# Allegro board democ2.brd
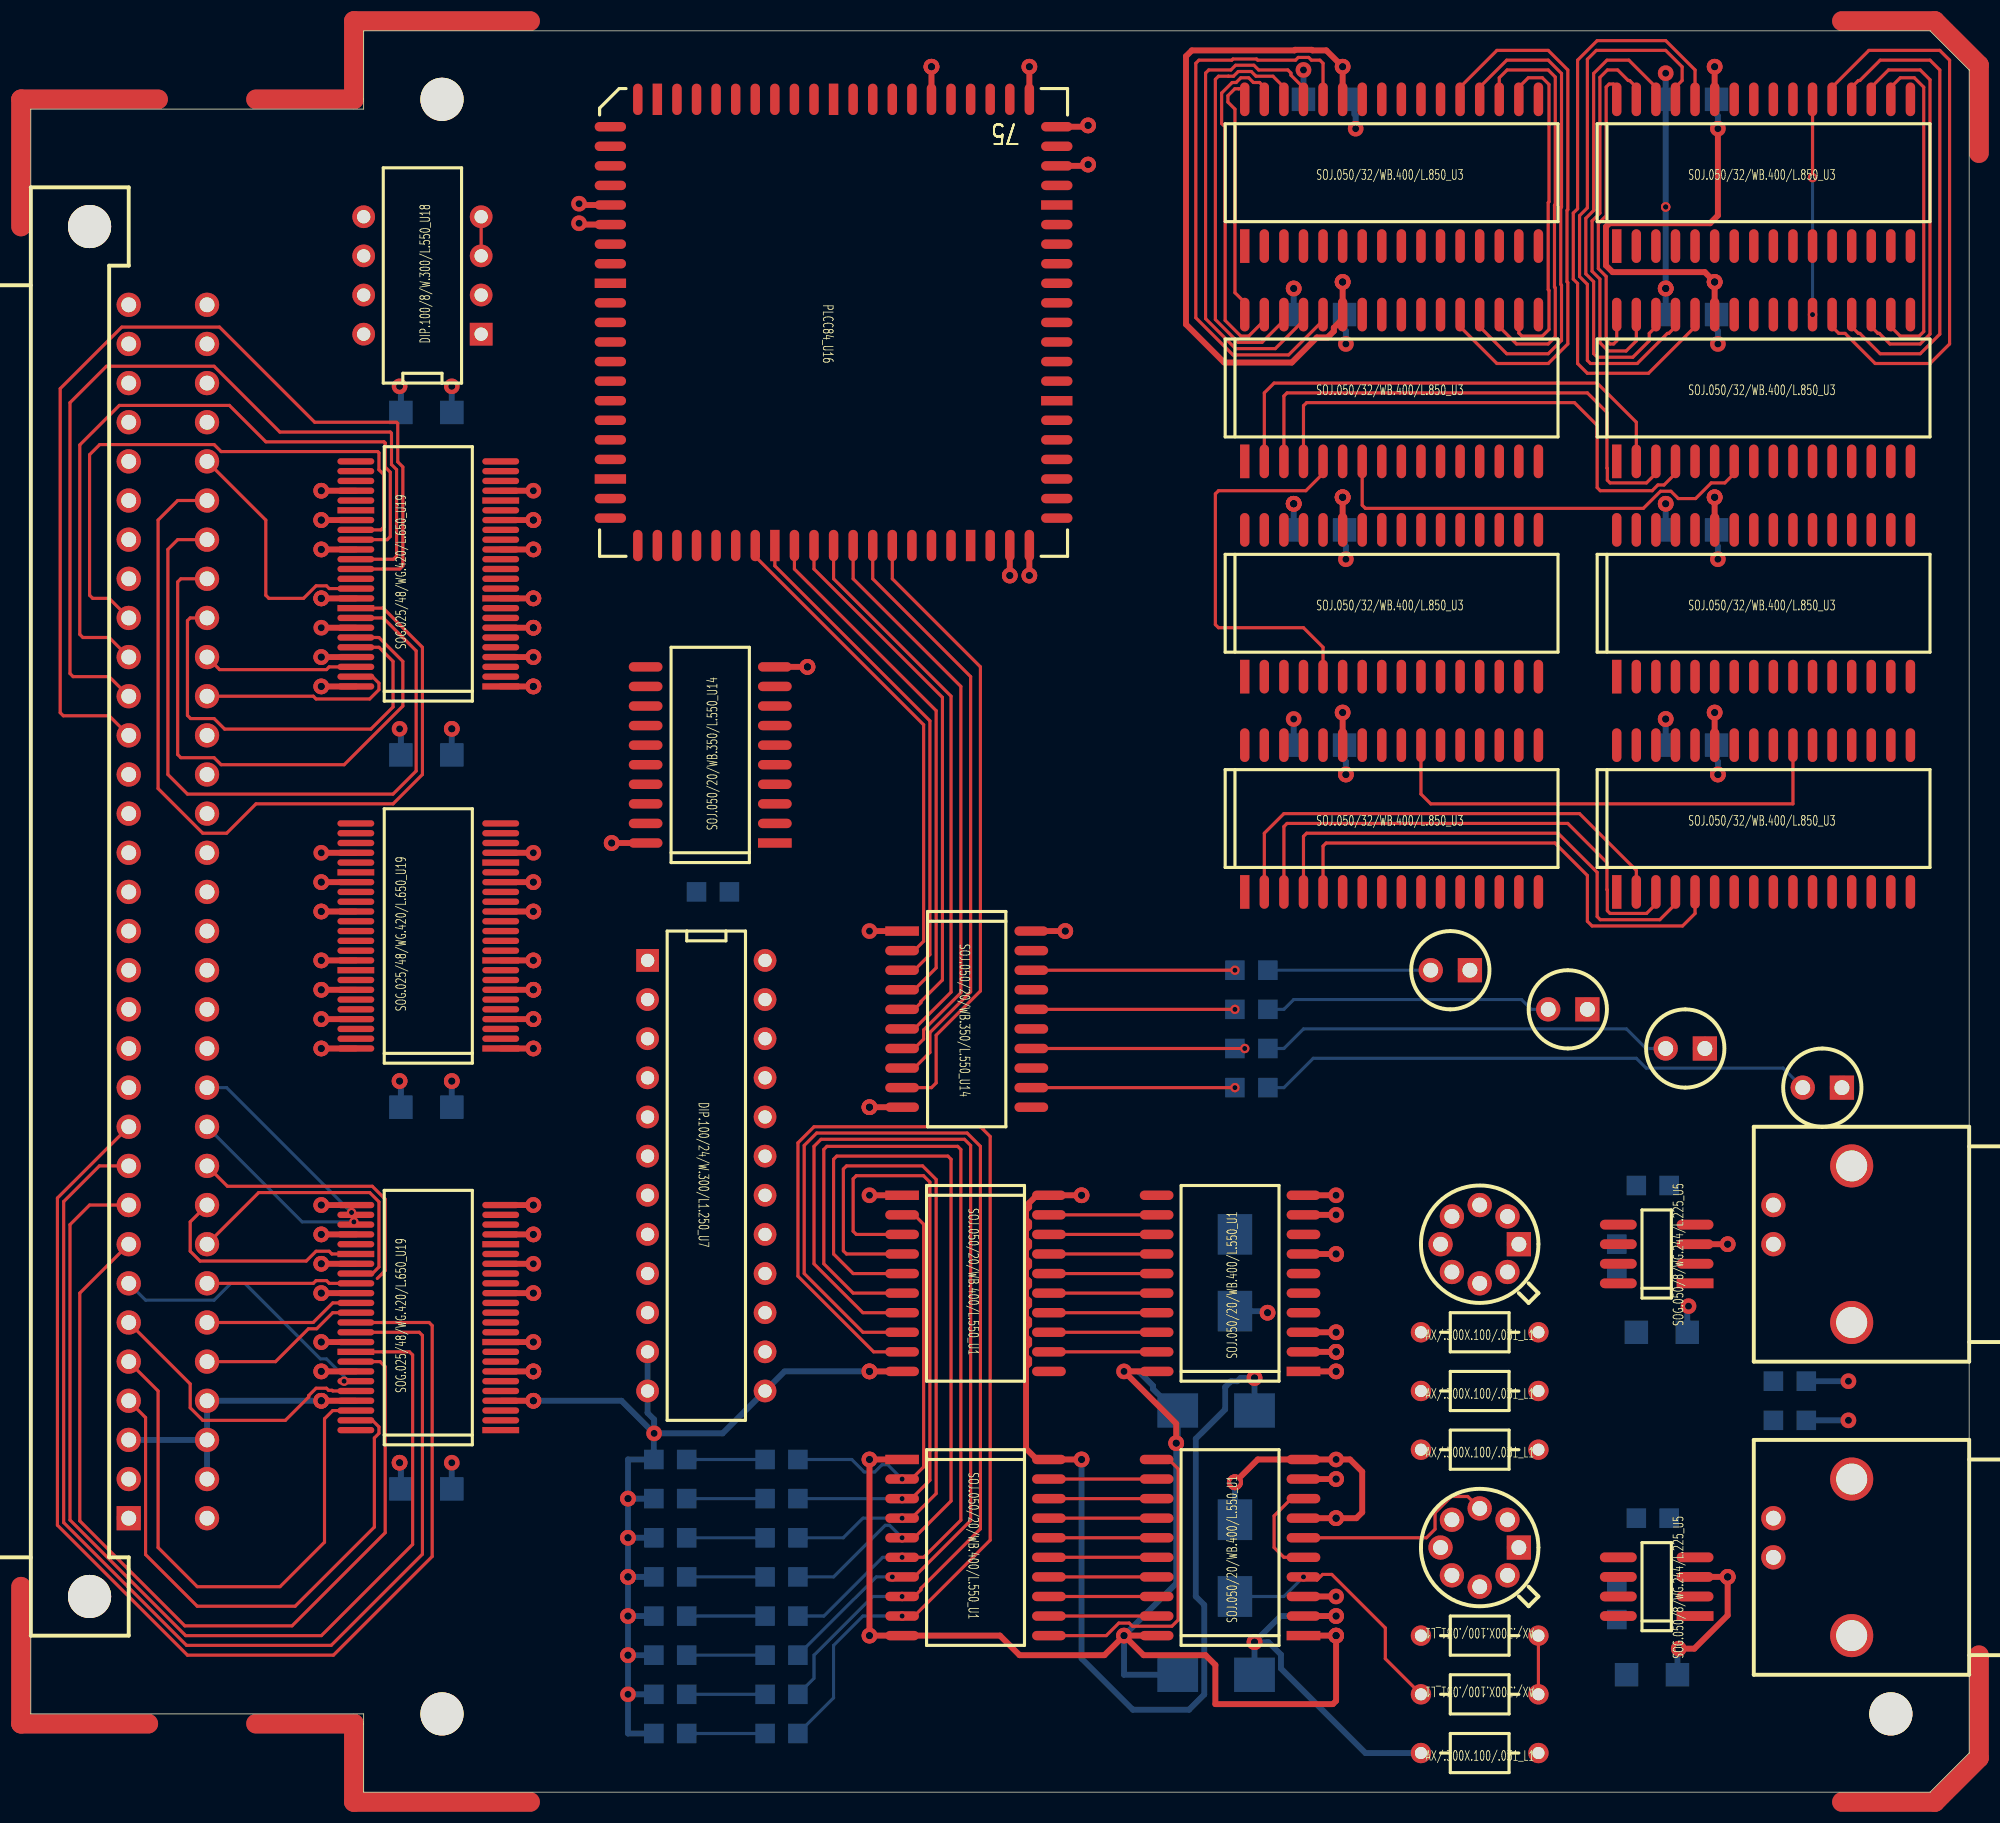
[diagram p0: board, top side]
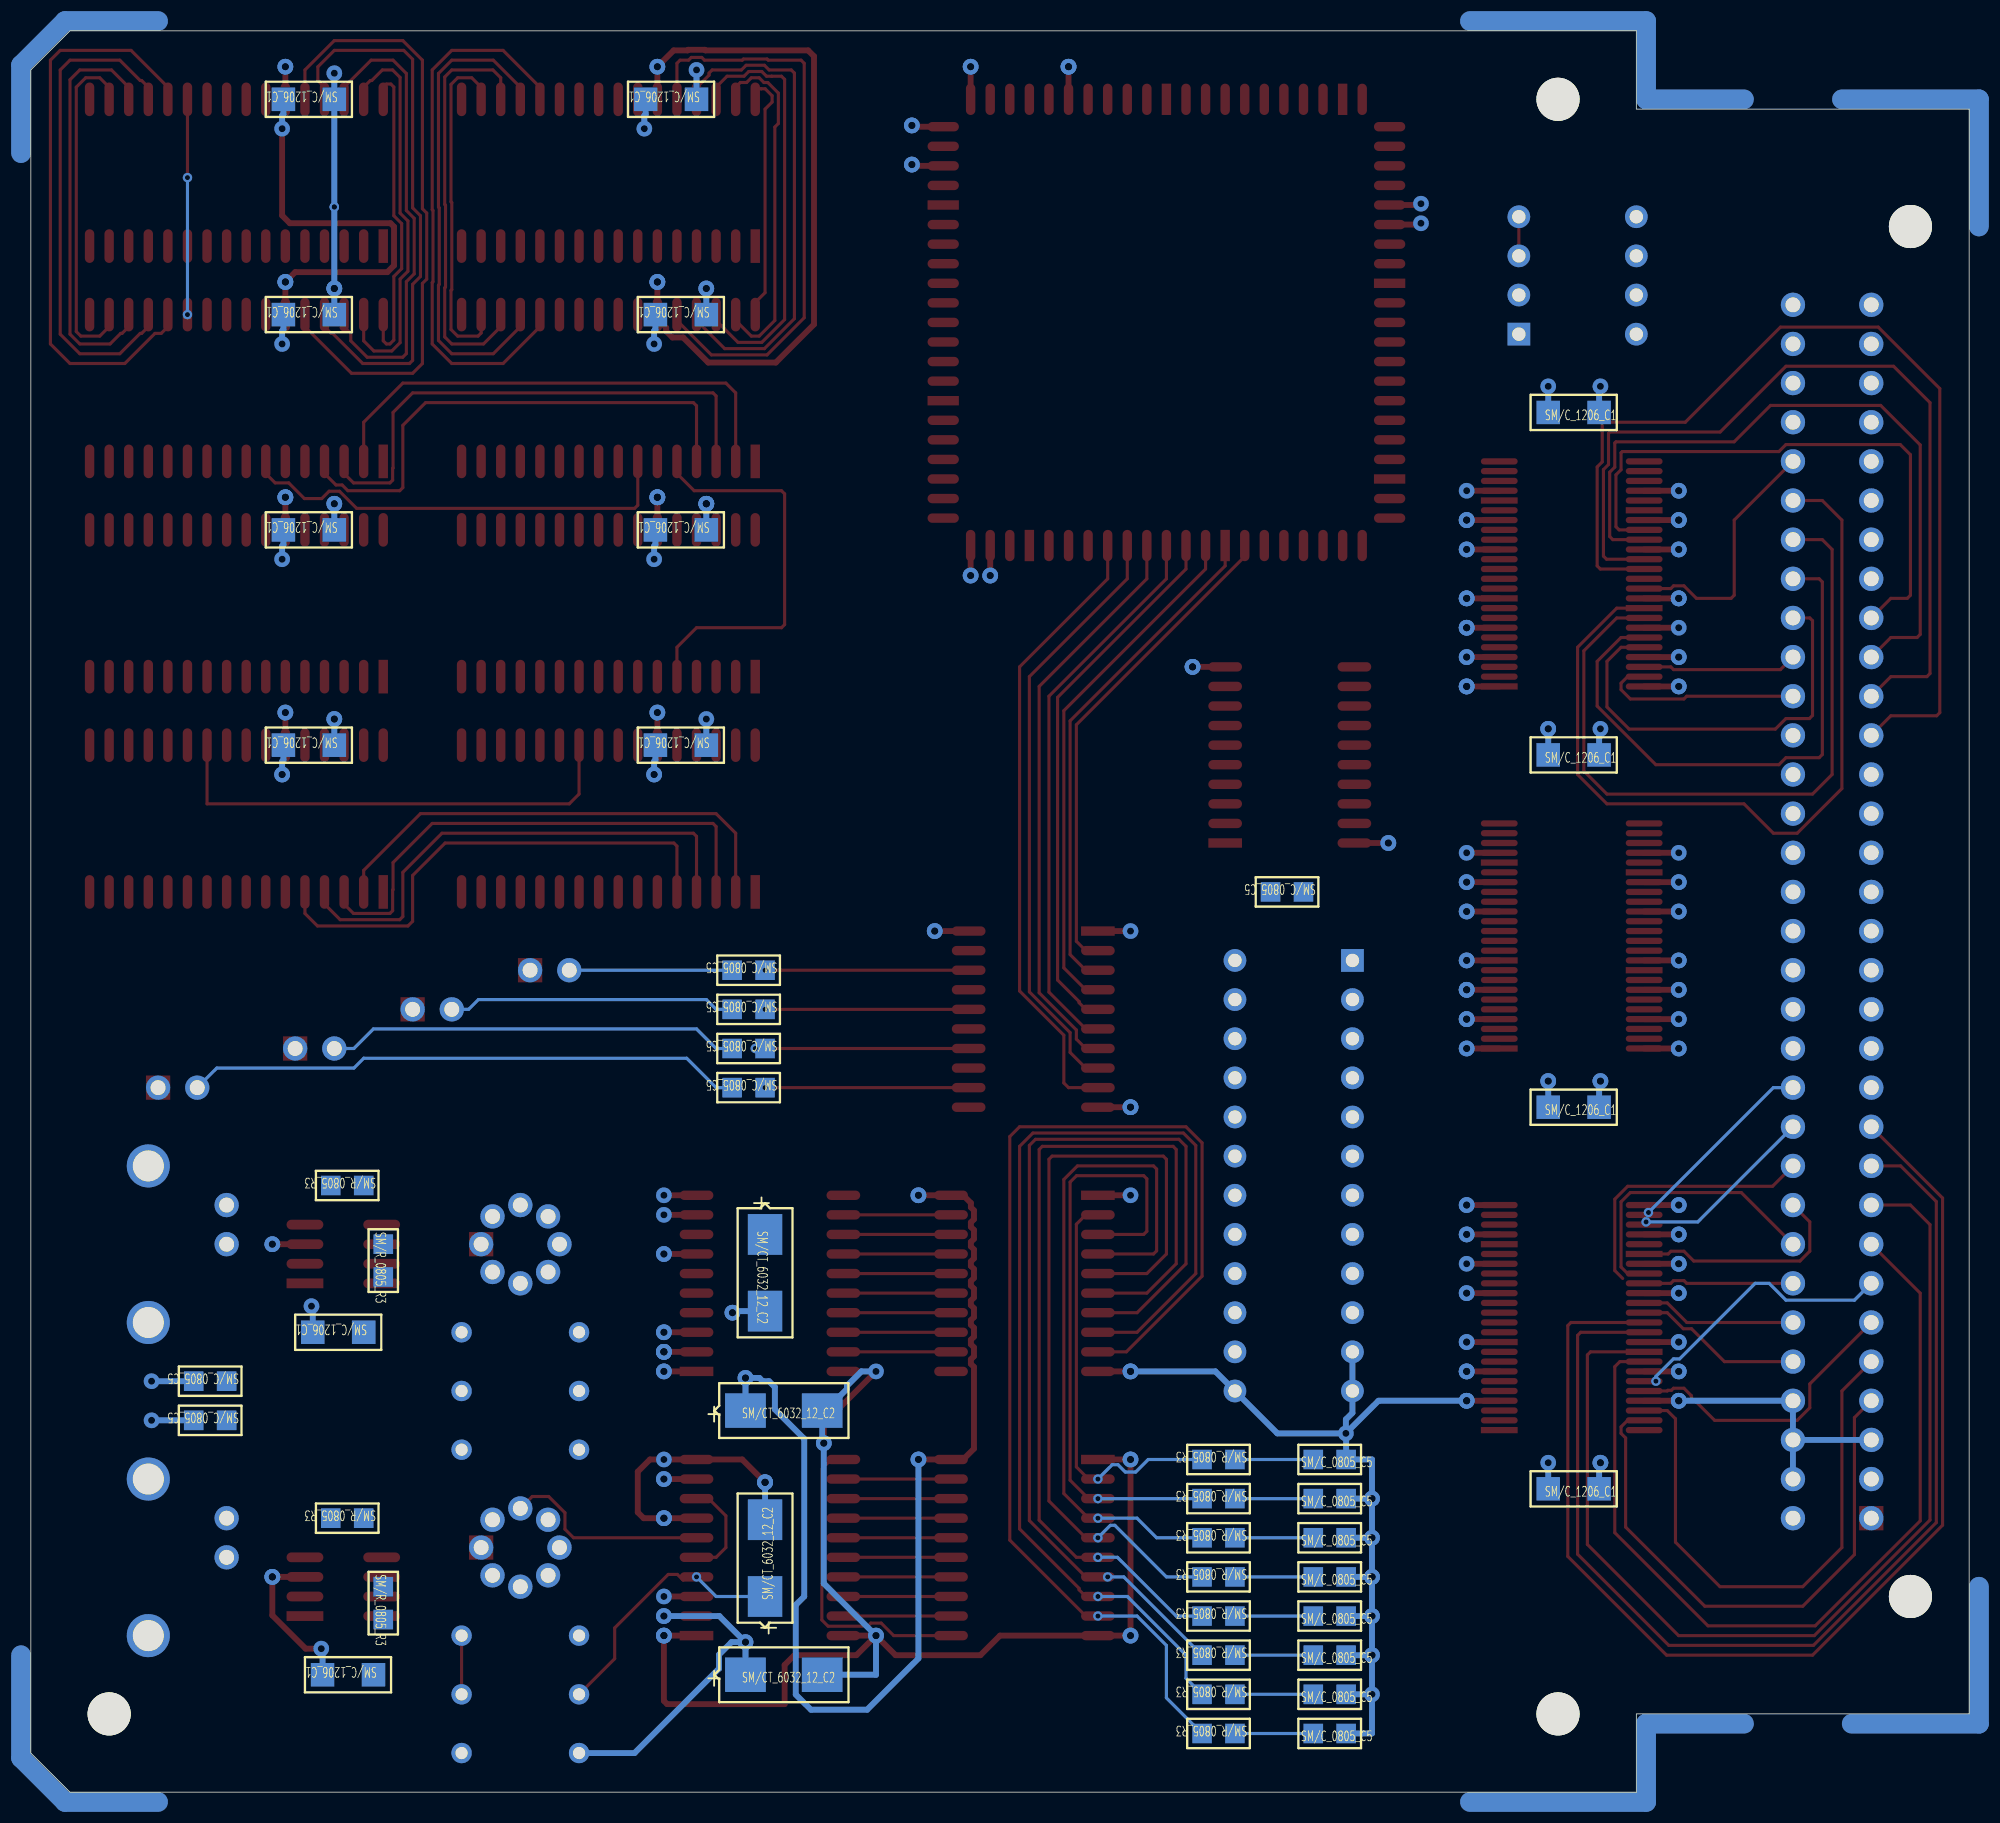
[diagram p1: board, bottom side, seen from below]

Outline 125.73 x 114.3 mm; copper layers: TOP, GND, POWER, BOTTOM. Coordinates in mm from the lower left corner of the outline.
Outline path: 0,109.22 21.59,109.22 21.59,114.3 123.19,114.3 125.73,111.76 125.73,2.54 123.19,0 21.59,0 21.59,5.08 0,5.08 0,109.22

## Design rules (mm)
nets with their own width: min track width 0.203; nets A0 A1 A2 A3 A4 A5 A6 A7 A8 A9 A10 A11 A12 A13 A14 A15 A16 A17 A18 A19 A20 A21 A22 A23 AEN/ BA0 BA1 BA2 BA3 BD0 BD1 BD2 BD3 BD4 BD5 BD6 BD7 BD8 BD9 BD10 BD11 BD12 BD13 BD14 BD15 BRD/ BRESET BWR/ D0 D1 D2 D3 D4 D5 D6 D7 D9 D10 D11 D12 D13 D14 D15 DDIR DEN/ DHEN/ FPGA/ GAIN HS/ MCLK MRD/ MWR/ N00036 N00036_6360 N00038 N00038_6372 N00044 N00044_6366 N00046 N00046_6362 N00048 N00048_6359 N00060 N00060_6368 N00306 N00318 N00322 N00671 N00689 N00703 N00717 N00827 N00831 N00835 N00837 N04966 N05690 N05692 N05694 N05696 N05698 N05700 N05702 N05704 N11940 N11950 N11984 N11994 N12004 N19706 N19710 N19714 N19718 N19934 N19938 N19942 N23417 N23878 N24816 N24821 N24826 N84247 N103899 N255822 N314771 N315146 N315333 N320476 N336036 N336041 OUTA OUTC RA0 RA1 RA2 RA3 RA4 RA5 RA6 RA7 RA8 RA9 RA10 RA11 RA12 RA13 RA14 RA15 RD0 RD1 RD2 RD3 RD4 RD5 RD6 RD7 RDY/ RESET/ SEL VCLKA VCLKC VD0 VD1 VD2 VD3 VD4 VD5 VD6 VD7 WAIT/ WSTAT/
nets with their own width: min track width 0.381; nets GND GND_EARTH V12N V+12 VCC

## Placement (name value [footprint] x y rotation side)
C1  .1UF  [SMC1206]  104.14 29.84 0 bottom
C2  .1UF  [SMCT603212]  79.38 24.77 180 bottom
C3  .1UF  [SMCT603212]  79.38 7.62 180 bottom
C4  .1UF  [SMC1206]  106.05 109.86 0 bottom
C5  3300  [SMC0805]  42.55 6.35 180 bottom
C6  .1UF  [SMC1206]  103.51 7.62 0 bottom
C7  3300  [SMC0805]  42.55 21.59 180 bottom
C8  3300  [SMC0805]  42.55 8.89 180 bottom
C9  .1UF  [SMC1206]  27.3 89.53 180 bottom
C10  .1UF  [SMC1206]  27.3 67.31 180 bottom
C11  .1UF  [SMC1206]  27.3 44.45 180 bottom
C12  .1UF  [SMC1206]  106.05 81.91 0 bottom
C13  .1UF  [SMC1206]  106.05 95.89 0 bottom
C14  .1UF  [SMC1206]  106.05 67.95 0 bottom
C15  .1UF  [SMC1206]  27.3 19.69 180 bottom
C16  3300  [SMC0805]  42.55 11.43 180 bottom
C17  3300  [SMC0805]  42.55 13.97 180 bottom
C18  47PF  [SMC0805]  113.03 26.67 0 bottom
C19  3300  [SMC0805]  42.55 3.81 180 bottom
C20  3300  [SMC0805]  42.55 16.51 180 bottom
C21  .1UF  [SMCT603212]  78.11 12.7 90 bottom
C22  .1UF  [SMCT603212]  78.11 36.2 270 bottom
C23  47PF  [SMC0805]  113.03 24.13 0 bottom
C24  3300  [SMC0805]  42.55 19.05 180 bottom
C25  .1UF  [SMC1206]  82.55 109.86 0 bottom
C26  .1UF  [SMC1206]  81.92 95.89 0 bottom
C27  .1UF  [SMC1206]  81.92 81.91 0 bottom
C28  .1UF  [SMC1206]  81.92 67.95 0 bottom
D1  DIODE PHOTO EMIT  [LED]  100.97 50.8 180 top
D2  DIODE PHOTO EMIT  [LED]  93.34 53.34 180 top
D3  DIODE PHOTO EMIT  [LED]  108.59 48.26 180 top
D4  DIODE PHOTO EMIT  [LED]  117.48 45.72 180 top
J1  CON PAD  [DIN64P]  6.35 17.78 90 top
J2  CHANNEL 1  [BNC2P]  113.03 15.24 270 top
J3  CHANNEL 2  [BNC2P]  113.03 35.56 270 top
L1  50  [AX300X100031]  90.17 22.23 0 top
L2  50  [AX300X100031]  90.17 29.84 0 top
L3  50  [AX300X100031]  97.79 6.35 180 top
L4  50  [AX300X100031]  90.17 26.03 0 top
L5  50  [AX300X100031]  97.79 10.16 180 top
L6  50  [AX300X100031]  90.17 2.54 0 top
MTH1  -  [MTHOLE1]  26.67 109.86 0 top
MTH2  -  [MTHOLE1]  26.67 5.08 0 top
MTH3  -  [MTHOLE1]  120.65 5.08 0 top
R1  150  [SMC0805]  78.11 53.34 0 bottom
R2  150  [SMC0805]  78.11 50.8 0 bottom
R3  100  [SMR0805]  104.14 17.78 0 bottom
R4  100  [SMR0805]  102.87 13.34 270 bottom
R5  100  [SMR0805]  102.87 35.56 270 bottom
R6  100  [SMR0805]  104.14 39.37 0 bottom
R7  50  [SMR0805]  47.62 21.59 0 bottom
R8  50  [SMR0805]  47.62 8.89 0 bottom
R9  50  [SMR0805]  47.62 11.43 0 bottom
R10  50  [SMR0805]  47.62 6.35 0 bottom
R11  50  [SMC0805]  43.18 58.42 0 bottom
R12  150  [SMC0805]  78.11 45.72 0 bottom
R13  50  [SMR0805]  47.62 19.05 0 bottom
R14  50  [SMR0805]  47.62 16.51 0 bottom
R15  50  [SMR0805]  47.62 13.97 0 bottom
R16  50  [SMR0805]  47.62 3.81 0 bottom
R17  150  [SMC0805]  78.11 48.26 0 bottom
U1  TLC5602A  [SOJ05020WB400L550]  82.55 10.16 90 top
U2  TLC5602A  [SOJ05020WB400L550]  82.55 27.3 90 top
U3  TC55B4257J  [SOJ05032WB400L850]  102.87 86.36 0 top
U4  TC55B4257J  [SOJ05032WB400L850]  102.87 100.33 0 top
U5  DG419A  [SOG0508WG244L225]  107.95 33.02 90 top
U6  DG419A  [SOG0508WG244L225]  107.95 11.43 90 top
U7  20L10  [DIP10024W300L1250]  40 53.98 270 top
U8  TC55B4257J  [SOJ05032WB400L850]  78.74 72.39 0 top
U9  TC55B4257J  [SOJ05032WB400L850]  78.74 100.33 0 top
U10  TC55B4257J  [SOJ05032WB400L850]  102.87 72.39 0 top
U11  TC55B4257J  [SOJ05032WB400L850]  102.87 58.42 0 top
U12  TC55B4257J  [SOJ05032WB400L850]  78.74 58.42 0 top
U13  TC55B4257J  [SOJ05032WB400L850]  78.74 86.36 0 top
U14  ACT574  [SOJ05020WB350L550]  56.52 55.88 270 top
U15  ACT574  [SOJ05020WB400L550]  56.52 21.59 270 top
U16  EPF8282  [PLCC84]  52.07 109.86 270 top
U17  ACT574  [SOJ05020WB400L550]  56.52 38.73 270 top
U18  EPC1064  [DIP1008W300L550]  29.21 94.61 90 top
U19  FCT16245  [SOG02548WG420L650]  30.48 71.75 90 top
U20  FCT16245  [SOG02548WG420L650]  30.48 23.49 90 top
U21  FCT16245  [SOG02548WG420L650]  30.48 48.26 90 top
U22  TLE2037A  [TO-99]  96.52 35.56 90 top
U23  TLE2037A  [TO-99]  96.52 15.88 90 top
U25  74ACT574  [SOJ05020WB350L550]  48.26 61.59 90 top

## Library data of the parts
C1-C3 C5-C8 C16 C17 C19-C22 C24 = CAP: alternate symbols: (SMCT603212;SMC0805)
C4 C9-C15 C25-C28 = CAP_NP
C18 C23 = CAPACITOR
D1-D4 = DIODE_PHOTO_EMIT
J1 = 64CONSEPPINS
J2 J3 = BNC
L1-L6 = INDUCTOR
MTH1-MTH3 = MTHOLE1
R1-R17 = R: alternate symbols: (SMR0805)
U1 U2 = TLC5602A
U3 U4 U8-U13 = TC56B4257J
U5 U6 = DG419A
U7 = 20L10
U14 U15 U17 = ACT574: alternate symbols: (SOJ05020WB400L550)
U16 = FPGA_0
U18 = EPC1064
U19-U21 = FCT16245
U22 U23 = TLE2037A
U25 = 74ACT574

## Footprints (pads in the part's own frame, mm; a bottom-side part is the same pattern mirrored in y, then rotated)
AX300X100031
  round 1.321 hole 0.787: 1(0,0) 2(7.62,0)
BNC2P
  round 1.575 hole 0.965: 1(0,0) 2(-2.54,0)
  round 2.794 hole 2.007: 3(5.08,5.08) 4(-5.08,5.08)
DIN64P
  rect 1.575x1.575 hole 0.965: 1(0,0)
  round 1.575 hole 0.965: 2(2.54,0) 3(5.08,0) 4(7.62,0) 5(10.16,0) 6(12.7,0) 7(15.24,0) 8(17.78,0) 9(20.32,0) 10(22.86,0) 11(25.4,0) 12(27.94,0) 13(30.48,0) 14(33.02,0) 15(35.56,0) 16(38.1,0) 17(40.64,0) 18(43.18,0) 19(45.72,0) 20(48.26,0) 21(50.8,0) 22(53.34,0) 23(55.88,0) 24(58.42,0) 25(60.96,0) 26(63.5,0) 27(66.04,0) 28(68.58,0) 29(71.12,0) 30(73.66,0) 31(76.2,0) 32(78.74,0) 33(0,-5.08) 34(2.54,-5.08) 35(5.08,-5.08) 36(7.62,-5.08) 37(10.16,-5.08) 38(12.7,-5.08) 39(15.24,-5.08) 40(17.78,-5.08) 41(20.32,-5.08) 42(22.86,-5.08) 43(25.4,-5.08) 44(27.94,-5.08) 45(30.48,-5.08) 46(33.02,-5.08) 47(35.56,-5.08) 48(38.1,-5.08) 49(40.64,-5.08) 50(43.18,-5.08) 51(45.72,-5.08) 52(48.26,-5.08) 53(50.8,-5.08) 54(53.34,-5.08) 55(55.88,-5.08) 56(58.42,-5.08) 57(60.96,-5.08) 58(63.5,-5.08) 59(66.04,-5.08) 60(68.58,-5.08) 61(71.12,-5.08) 62(73.66,-5.08) 63(76.2,-5.08) 64(78.74,-5.08)
  round 2.794 hole 2.794: 65(83.82,2.54) 66(-5.08,2.54)
DIP1008W300L550
  rect 1.473x1.473 hole 0.864: 1(0,0)
  round 1.473 hole 0.864: 2(2.54,0) 3(5.08,0) 4(7.62,0) 5(7.62,7.62) 6(5.08,7.62) 7(2.54,7.62) 8(0,7.62)
DIP10024W300L1250
  rect 1.473x1.473 hole 0.864: 1(0,0)
  round 1.473 hole 0.864: 2(2.54,0) 3(5.08,0) 4(7.62,0) 5(10.16,0) 6(12.7,0) 7(15.24,0) 8(17.78,0) 9(20.32,0) 10(22.86,0) 11(25.4,0) 12(27.94,0) 13(27.94,7.62) 14(25.4,7.62) 15(22.86,7.62) 16(20.32,7.62) 17(17.78,7.62) 18(15.24,7.62) 19(12.7,7.62) 20(10.16,7.62) 21(7.62,7.62) 22(5.08,7.62) 23(2.54,7.62) 24(0,7.62)
LED
  rect 1.575x1.575 hole 0.965: 1(0,0)
  round 1.575 hole 0.965: 2(2.54,0)
MTHOLE1
  round 2.794 hole 2.794: 1(0,0)
PLCC84
  rect 2.032x0.61 smd: 1(0,0) 10(0,-11.43) 40(28.956,-3.81) 50(28.956,8.89)
  oval 2.032x0.61 smd: 2(0,-1.27) 3(0,-2.54) 4(0,-3.81) 5(0,-5.08) 6(0,-6.35) 7(0,-7.62) 8(0,-8.89) 9(0,-10.16) 11(0,-12.7) 33(28.956,-12.7) 34(28.956,-11.43) 35(28.956,-10.16) 36(28.956,-8.89) 37(28.956,-7.62) 38(28.956,-6.35) 39(28.956,-5.08) 41(28.956,-2.54) 42(28.956,-1.27) 43(28.956,0) 44(28.956,1.27) 45(28.956,2.54) 46(28.956,3.81) 47(28.956,5.08) 48(28.956,6.35) 49(28.956,7.62) 51(28.956,10.16) 52(28.956,11.43) 53(28.956,12.7) 75(0,12.7) 76(0,11.43) 77(0,10.16) 78(0,8.89) 79(0,7.62) 80(0,6.35) 81(0,5.08) 82(0,3.81) 83(0,2.54) 84(0,1.27)
  oval 0.61x2.032 smd: 12(1.778,-14.478) 13(3.048,-14.478) 14(4.318,-14.478) 15(5.588,-14.478) 16(6.858,-14.478) 17(8.128,-14.478) 18(9.398,-14.478) 19(10.668,-14.478) 21(13.208,-14.478) 22(14.478,-14.478) 23(15.748,-14.478) 24(17.018,-14.478) 25(18.288,-14.478) 26(19.558,-14.478) 27(20.828,-14.478) 28(22.098,-14.478) 29(23.368,-14.478) 31(25.908,-14.478) 32(27.178,-14.478) 54(27.178,14.478) 55(25.908,14.478) 56(24.638,14.478) 57(23.368,14.478) 58(22.098,14.478) 59(20.828,14.478) 61(18.288,14.478) 62(17.018,14.478) 63(15.748,14.478) 64(14.478,14.478) 65(13.208,14.478) 66(11.938,14.478) 67(10.668,14.478) 68(9.398,14.478) 69(8.128,14.478) 71(5.588,14.478) 72(4.318,14.478) 73(3.048,14.478) 74(1.778,14.478)
  rect 0.61x2.032 smd: 20(11.938,-14.478) 30(24.638,-14.478) 60(19.558,14.478) 70(6.858,14.478)
SMC0805
  rect 1.27x1.27 smd: 1(0,0) 2(2.134,0)
SMC1206
  rect 1.524x1.524 smd: 1(0,0) 2(3.302,0)
SMCT603212
  rect 2.642x2.235 smd: 1(0,0) 2(4.978,0)
SMR0805
  rect 1.27x1.27 smd: 1(0,0) 2(2.134,0)
SOG0508WG244L225
  rect 0.635x2.388 smd: 1(0,0)
  oval 0.635x2.388 smd: 2(1.27,0) 3(2.54,0) 4(3.81,0) 5(3.81,4.978) 6(2.54,4.978) 7(1.27,4.978) 8(0,4.978)
SOG02548WG420L650
  rect 0.406x2.388 smd: 1(0,0) 10(5.715,0) 20(12.065,0) 30(11.43,9.398) 40(5.08,9.398)
  oval 0.406x2.388 smd: 2(0.635,0) 3(1.27,0) 4(1.905,0) 5(2.54,0) 6(3.175,0) 7(3.81,0) 8(4.445,0) 9(5.08,0) 11(6.35,0) 12(6.985,0) 13(7.62,0) 14(8.255,0) 15(8.89,0) 16(9.525,0) 17(10.16,0) 18(10.795,0) 19(11.43,0) 21(12.7,0) 22(13.335,0) 23(13.97,0) 24(14.605,0) 25(14.605,9.398) 26(13.97,9.398) 27(13.335,9.398) 28(12.7,9.398) 29(12.065,9.398) 31(10.795,9.398) 32(10.16,9.398) 33(9.525,9.398) 34(8.89,9.398) 35(8.255,9.398) 36(7.62,9.398) 37(6.985,9.398) 38(6.35,9.398) 39(5.715,9.398) 41(4.445,9.398) 42(3.81,9.398) 43(3.175,9.398) 44(2.54,9.398) 45(1.905,9.398) 46(1.27,9.398) 47(0.635,9.398) 48(0,9.398)
SOJ05020WB350L550
  rect 0.61x2.184 smd: 1(0,0)
  oval 0.61x2.184 smd: 2(1.27,0) 3(2.54,0) 4(3.81,0) 5(5.08,0) 6(6.35,0) 7(7.62,0) 8(8.89,0) 9(10.16,0) 10(11.43,0) 11(11.43,8.382) 12(10.16,8.382) 13(8.89,8.382) 14(7.62,8.382) 15(6.35,8.382) 16(5.08,8.382) 17(3.81,8.382) 18(2.54,8.382) 19(1.27,8.382) 20(0,8.382)
SOJ05020WB400L550
  rect 0.61x2.184 smd: 1(0,0)
  oval 0.61x2.184 smd: 2(1.27,0) 3(2.54,0) 4(3.81,0) 5(5.08,0) 6(6.35,0) 7(7.62,0) 8(8.89,0) 9(10.16,0) 10(11.43,0) 11(11.43,9.525) 12(10.16,9.525) 13(8.89,9.525) 14(7.62,9.525) 15(6.35,9.525) 16(5.08,9.525) 17(3.81,9.525) 18(2.54,9.525) 19(1.27,9.525) 20(0,9.525)
SOJ05032WB400L850
  rect 0.61x2.184 smd: 1(0,0)
  oval 0.61x2.184 smd: 2(1.27,0) 3(2.54,0) 4(3.81,0) 5(5.08,0) 6(6.35,0) 7(7.62,0) 8(8.89,0) 9(10.16,0) 10(11.43,0) 11(12.7,0) 12(13.97,0) 13(15.24,0) 14(16.51,0) 15(17.78,0) 16(19.05,0) 17(19.05,9.525) 18(17.78,9.525) 19(16.51,9.525) 20(15.24,9.525) 21(13.97,9.525) 22(12.7,9.525) 23(11.43,9.525) 24(10.16,9.525) 25(8.89,9.525) 26(7.62,9.525) 27(6.35,9.525) 28(5.08,9.525) 29(3.81,9.525) 30(2.54,9.525) 31(1.27,9.525) 32(0,9.525)
TO-99
  rect 1.575x1.575 hole 0.965: 1(0,0)
  round 1.575 hole 0.965: 2(1.803,0.737) 3(2.54,2.54) 4(1.803,4.343) 5(0,5.08) 6(-1.803,4.343) 7(-2.54,2.54) 8(-1.803,0.737)

## Nets
AGND: C1.2(TP-2) C6.2(TP-2) C21.2(TP-2) C22.2(TP-2) J1.1(TP-1) J1.2(TP-2) J1.33(TP-33) U1.3(TP-3) U1.7(TP-7) U1.10(TP-10) U2.3(TP-3) U2.7(TP-7) U2.10(TP-10) U5.3(TP-3) U6.3(TP-3)
GND: C2.2(TP-2) C3.2(TP-2) C4.2(TP-2) C5.2(TP-2) C7.2(TP-2) C8.2(TP-2) C9.2(TP-2) C10.2(TP-2) C11.2(TP-2) C12.2(TP-2) C13.2(TP-2) C14.2(TP-2) C15.2(TP-2) C16.2(TP-2) C17.2(TP-2) C19.2(TP-2) C20.2(TP-2) C24.2(TP-2) C25.2(TP-2) C26.2(TP-2) C27.2(TP-2) C28.2(TP-2) J1.3(TP-3) J1.34(TP-34) J1.35(TP-35) J1.36(TP-36) U1.1(TP-1) U1.20(TP-20) U2.1(TP-1) U2.20(TP-20) U3.27(TP-27) U4.27(TP-27) U7.11(TP-11) U7.12(TP-12) U7.13(TP-13) U8.27(TP-27) U9.27(TP-27) U10.27(TP-27) U11.27(TP-27) U12.27(TP-27) U13.27(TP-27) U14.1(TP-1) U14.10(TP-10) U15.1(TP-1) U15.10(TP-10) U16.17(TP-17) U16.53(TP-53) U16.74(TP-74) U16.75(TP-75) U17.1(TP-1) U17.10(TP-10) U19.1(TP-1) U19.4(TP-4) U19.10(TP-10) U19.15(TP-15) U19.21(TP-21) U19.28(TP-28) U19.34(TP-34) U19.39(TP-39) U19.45(TP-45) U19.48(TP-48) U20.4(TP-4) U20.10(TP-10) U20.15(TP-15) U20.21(TP-21) U20.24(TP-24) U20.25(TP-25) U20.28(TP-28) U20.34(TP-34) U20.39(TP-39) U20.45(TP-45) U21.1(TP-1) U21.4(TP-4) U21.10(TP-10) U21.15(TP-15) U21.21(TP-21) U21.28(TP-28) U21.34(TP-34) U21.39(TP-39) U21.45(TP-45) U21.48(TP-48) U25.10(TP-10)
GND_EARTH: C18.2(TP-2) C23.2(TP-2) J2.2(TP-2) J3.2(TP-2)
V12N: J1.31(TP-31) J1.32(TP-32) U5.7(TP-7) U6.7(TP-7) U22.4(TP-4) U23.4(TP-4)
VCC: C2.1(TP-1) C3.1(TP-1) C4.1(TP-1) C9.1(TP-1) C10.1(TP-1) C11.1(TP-1) C12.1(TP-1) C13.1(TP-1) C14.1(TP-1) C15.1(TP-1) C25.1(TP-1) C26.1(TP-1) C27.1(TP-1) C28.1(TP-1) D1.1(TP-1) D2.1(TP-1) D3.1(TP-1) D4.1(TP-1) J1.29(TP-29) J1.30(TP-30) J1.62(TP-62) L2.1(TP-1) L6.1(TP-1) U1.2(TP-2) U1.9(TP-9) U2.2(TP-2) U2.9(TP-9) U7.24(TP-24) U14.20(TP-20) U15.20(TP-20) U16.16(TP-16) U16.52(TP-52) U16.72(TP-72) U16.80(TP-80) U17.20(TP-20) U19.7(TP-7) U19.18(TP-18) U19.31(TP-31) U19.42(TP-42) U20.7(TP-7) U20.18(TP-18) U20.31(TP-31) U20.42(TP-42) U21.7(TP-7) U21.18(TP-18) U21.31(TP-31) U21.42(TP-42) U25.20(TP-20)
A0: J1.54(TP-54) U19.47(TP-47)
A1: J1.55(TP-55) U19.46(TP-46)
A2: J1.56(TP-56) U19.44(TP-44)
A3: J1.57(TP-57) U19.43(TP-43)
A4: J1.58(TP-58) U19.41(TP-41)
A5: J1.59(TP-59) U19.40(TP-40)
A6: J1.60(TP-60) U19.38(TP-38)
A7: J1.61(TP-61) U19.37(TP-37)
A8: J1.13(TP-13) U21.47(TP-47)
A9: J1.14(TP-14) U21.46(TP-46)
A10: J1.15(TP-15) U21.44(TP-44)
A11: J1.16(TP-16) U21.43(TP-43)
A12: J1.17(TP-17) U21.41(TP-41)
A13: J1.18(TP-18) U21.40(TP-40)
A14: J1.19(TP-19) U21.38(TP-38)
A15: J1.20(TP-20) U21.37(TP-37)
A16: J1.37(TP-37) U20.36(TP-36)
A17: J1.38(TP-38) U20.35(TP-35)
A18: J1.39(TP-39) U7.6(TP-6) U20.33(TP-33)
A19: J1.40(TP-40) U7.5(TP-5) U20.32(TP-32)
A20: J1.41(TP-41) U7.4(TP-4) U20.30(TP-30)
A21: J1.42(TP-42) U7.3(TP-3) U20.29(TP-29)
A22: J1.43(TP-43) U7.2(TP-2) U20.27(TP-27)
A23: J1.44(TP-44) U7.1(TP-1) U20.26(TP-26)
AEN/: J1.47(TP-47) U7.8(TP-8)
BA0: U16.6(TP-6) U19.2(TP-2) U20.13(TP-13) U21.2(TP-2)
BA1: U16.7(TP-7) U19.3(TP-3) U20.14(TP-14) U21.3(TP-3)
BA2: U16.8(TP-8) U19.5(TP-5) U20.16(TP-16) U21.5(TP-5)
BA3: U16.9(TP-9) U19.6(TP-6) U20.17(TP-17) U21.6(TP-6)
BD0: U16.25(TP-25) U19.13(TP-13)
BD1: U16.24(TP-24) U19.14(TP-14)
BD2: U16.23(TP-23) U19.16(TP-16)
BD3: U16.22(TP-22) U19.17(TP-17)
BD4: U16.21(TP-21) U19.19(TP-19)
BD5: U16.20(TP-20) U19.20(TP-20)
BD6: U16.19(TP-19) U19.22(TP-22)
BD7: U16.18(TP-18) U19.23(TP-23)
BD8: U20.2(TP-2) U21.23(TP-23)
BD9: U20.3(TP-3) U21.22(TP-22)
BD10: U20.5(TP-5) U21.20(TP-20)
BD11: U20.6(TP-6) U21.19(TP-19)
BD12: U20.8(TP-8) U21.17(TP-17)
BD13: U20.9(TP-9) U21.16(TP-16)
BD14: U20.11(TP-11) U21.14(TP-14)
BD15: U20.12(TP-12) U21.13(TP-13)
BRD/: U7.15(TP-15) U16.73(TP-73)
BRESET: U7.14(TP-14) U16.12(TP-12)
BWR/: U7.16(TP-16) U16.54(TP-54)
D0: J1.28(TP-28) U19.26(TP-26) U21.26(TP-26)
D1: J1.27(TP-27) U19.27(TP-27) U21.27(TP-27)
D2: J1.26(TP-26) U19.29(TP-29) U21.29(TP-29)
D3: J1.25(TP-25) U19.30(TP-30) U21.30(TP-30)
D4: J1.24(TP-24) U19.32(TP-32) U21.32(TP-32)
D5: J1.23(TP-23) U19.33(TP-33) U21.33(TP-33)
D6: J1.4(TP-4) J1.22(TP-22) U19.35(TP-35) U20.47(TP-47) U21.35(TP-35)
D7: J1.21(TP-21) U19.36(TP-36) U21.36(TP-36)
D9: J1.5(TP-5) U20.46(TP-46)
D10: J1.6(TP-6) U20.44(TP-44)
D11: J1.7(TP-7) U20.43(TP-43)
D12: J1.8(TP-8) U20.41(TP-41)
D13: J1.9(TP-9) U20.40(TP-40)
D14: J1.10(TP-10) U20.38(TP-38)
D15: J1.11(TP-11) U20.37(TP-37)
DDIR: U7.19(TP-19) U19.24(TP-24) U20.1(TP-1) U21.24(TP-24)
DEN/: U7.20(TP-20) U19.25(TP-25) U20.48(TP-48)
DHEN/: U7.21(TP-21) U21.25(TP-25)
FPGA/: U7.17(TP-17) U16.30(TP-30)
GAIN: U5.6(TP-6) U6.6(TP-6) U16.28(TP-28)
HS/: U7.18(TP-18) U16.29(TP-29)
MCLK: J1.52(TP-52) U16.31(TP-31)
MRD/: J1.46(TP-46) U7.9(TP-9)
MWR/: J1.45(TP-45) U7.10(TP-10)
N00036_6360: L6.2(TP-2) R3.1(TP-1) R4.1(TP-1) U1.5(TP-5) U1.8(TP-8) U6.5(TP-5)
N00038_6372: C21.1(TP-1) L3.2(TP-2) U1.4(TP-4)
N00044_6366: U6.1(TP-1) U23.2(TP-2)
N00046_6362: R4.2(TP-2) U6.8(TP-8)
N00048_6359: R3.2(TP-2) U6.2(TP-2)
N00060_6368: U1.6(TP-6) U23.3(TP-3)
OUTA: L1.1(TP-1) U23.6(TP-6)
OUTC: L4.1(TP-1) U22.6(TP-6)
RA0: U3.5(TP-5) U4.5(TP-5) U8.5(TP-5) U9.5(TP-5) U10.5(TP-5) U11.5(TP-5) U12.5(TP-5) U13.5(TP-5) U16.58(TP-58)
RA1: U3.4(TP-4) U4.4(TP-4) U8.4(TP-4) U9.4(TP-4) U10.4(TP-4) U11.4(TP-4) U12.4(TP-4) U13.4(TP-4) U16.60(TP-60)
RA2: U3.3(TP-3) U4.3(TP-3) U8.3(TP-3) U9.3(TP-3) U10.3(TP-3) U11.3(TP-3) U12.3(TP-3) U13.3(TP-3) U16.61(TP-61)
RA3: U3.2(TP-2) U4.2(TP-2) U8.2(TP-2) U9.2(TP-2) U10.2(TP-2) U11.2(TP-2) U12.2(TP-2) U13.2(TP-2) U16.62(TP-62)
RA4: U3.32(TP-32) U4.32(TP-32) U8.32(TP-32) U9.32(TP-32) U10.32(TP-32) U11.32(TP-32) U12.32(TP-32) U13.32(TP-32) U16.63(TP-63)
RA5: U3.31(TP-31) U4.31(TP-31) U8.31(TP-31) U9.31(TP-31) U10.31(TP-31) U11.31(TP-31) U12.31(TP-31) U13.31(TP-31) U16.64(TP-64)
RA6: U3.30(TP-30) U4.30(TP-30) U8.30(TP-30) U9.30(TP-30) U10.30(TP-30) U11.30(TP-30) U12.30(TP-30) U13.30(TP-30) U16.65(TP-65)
RA7: U3.29(TP-29) U4.29(TP-29) U8.29(TP-29) U9.29(TP-29) U10.29(TP-29) U11.29(TP-29) U12.29(TP-29) U13.29(TP-29) U16.66(TP-66)
RA8: U3.28(TP-28) U4.28(TP-28) U8.28(TP-28) U9.28(TP-28) U10.28(TP-28) U11.28(TP-28) U12.28(TP-28) U13.28(TP-28) U16.67(TP-67)
RA9: U3.22(TP-22) U4.22(TP-22) U8.22(TP-22) U9.22(TP-22) U10.22(TP-22) U11.22(TP-22) U12.22(TP-22) U13.22(TP-22) U16.69(TP-69)
RA10: U3.21(TP-21) U4.21(TP-21) U8.21(TP-21) U9.21(TP-21) U10.21(TP-21) U11.21(TP-21) U12.21(TP-21) U13.21(TP-21) U16.70(TP-70)
RA11: U3.20(TP-20) U4.20(TP-20) U8.20(TP-20) U9.20(TP-20) U10.20(TP-20) U11.20(TP-20) U12.20(TP-20) U13.20(TP-20) U16.71(TP-71)
RA12: U3.19(TP-19) U4.19(TP-19) U8.19(TP-19) U9.19(TP-19) U10.19(TP-19) U11.19(TP-19) U12.19(TP-19) U13.19(TP-19) U16.76(TP-76)
RA13: U3.18(TP-18) U4.18(TP-18) U8.18(TP-18) U9.18(TP-18) U10.18(TP-18) U11.18(TP-18) U12.18(TP-18) U13.18(TP-18) U16.77(TP-77)
RA14: U3.15(TP-15) U4.15(TP-15) U8.15(TP-15) U9.15(TP-15) U10.15(TP-15) U11.15(TP-15) U12.15(TP-15) U13.15(TP-15) U16.78(TP-78)
RA15: U3.14(TP-14) U4.14(TP-14) U8.14(TP-14) U9.14(TP-14) U10.14(TP-14) U11.14(TP-14) U12.14(TP-14) U13.14(TP-14) U16.79(TP-79)
RD0: U4.26(TP-26) U8.26(TP-26) U9.26(TP-26) U10.26(TP-26) U16.81(TP-81)
RD1: U4.23(TP-23) U8.23(TP-23) U9.23(TP-23) U10.23(TP-23) U16.82(TP-82)
RD2: U4.10(TP-10) U8.10(TP-10) U9.10(TP-10) U10.10(TP-10) U16.83(TP-83)
RD3: U4.7(TP-7) U8.7(TP-7) U9.7(TP-7) U10.7(TP-7) U16.84(TP-84)
RD4: U3.26(TP-26) U11.26(TP-26) U12.26(TP-26) U13.26(TP-26) U16.1(TP-1)
RD5: U3.23(TP-23) U11.23(TP-23) U12.23(TP-23) U13.23(TP-23) U16.2(TP-2)
RD6: U3.10(TP-10) U11.10(TP-10) U12.10(TP-10) U13.10(TP-10) U16.3(TP-3)
RD7: U3.7(TP-7) U11.7(TP-7) U12.7(TP-7) U13.7(TP-7) U16.4(TP-4)
RDY/: J1.50(TP-50) U7.22(TP-22)
RESET/: J1.53(TP-53) U16.15(TP-15)
SEL: U7.23(TP-23) U16.13(TP-13)
V+12: C1.1(TP-1) C6.1(TP-1) J1.63(TP-63) J1.64(TP-64) U5.4(TP-4) U6.4(TP-4) U22.7(TP-7) U23.7(TP-7)
VCLKA: U1.11(TP-11) U2.11(TP-11) U15.11(TP-11) U16.34(TP-34)
VCLKC: R11.2(TP-2) U17.11(TP-11)
VD0: R7.2(TP-2) U14.2(TP-2) U15.2(TP-2) U16.39(TP-39) U17.2(TP-2)
VD1: R13.2(TP-2) U14.3(TP-3) U15.3(TP-3) U16.40(TP-40) U17.3(TP-3)
VD2: R14.2(TP-2) U14.4(TP-4) U15.4(TP-4) U16.41(TP-41) U17.4(TP-4)
VD3: R15.2(TP-2) U14.5(TP-5) U15.5(TP-5) U16.42(TP-42) U17.5(TP-5)
VD4: R9.2(TP-2) U14.6(TP-6) U15.6(TP-6) U16.43(TP-43) U17.6(TP-6)
VD5: R8.2(TP-2) U14.7(TP-7) U15.7(TP-7) U16.44(TP-44) U17.7(TP-7)
VD6: R10.2(TP-2) U14.8(TP-8) U15.8(TP-8) U16.45(TP-45) U17.8(TP-8)
VD7: R16.2(TP-2) U14.9(TP-9) U15.9(TP-9) U16.46(TP-46) U17.9(TP-9)
WAIT/: J1.51(TP-51) U16.33(TP-33)
WSTAT/: U14.11(TP-11) U16.56(TP-56)
N00036: L2.2(TP-2) R5.1(TP-1) R6.1(TP-1) U2.5(TP-5) U2.8(TP-8) U5.5(TP-5)
N00038: C22.1(TP-1) L5.2(TP-2) U2.4(TP-4)
N00044: U5.1(TP-1) U22.2(TP-2)
N00046: R5.2(TP-2) U5.8(TP-8)
N00048: R6.2(TP-2) U5.2(TP-2)
N00060: U2.6(TP-6) U22.3(TP-3)
N00306: U1.12(TP-12) U15.19(TP-19)
N00318: U1.15(TP-15) U15.16(TP-16)
N00322: U1.16(TP-16) U15.15(TP-15)
N00671: C19.1(TP-1) R16.1(TP-1)
N00689: C5.1(TP-1) R10.1(TP-1)
N00703: C8.1(TP-1) R8.1(TP-1)
N00717: C16.1(TP-1) R9.1(TP-1)
N00827: C17.1(TP-1) R15.1(TP-1)
N00831: C20.1(TP-1) R14.1(TP-1)
N00835: C24.1(TP-1) R13.1(TP-1)
N00837: C7.1(TP-1) R7.1(TP-1)
N04966: L3.1(TP-1) L5.1(TP-1)
N05690: U2.12(TP-12) U17.19(TP-19)
N05692: U2.18(TP-18) U17.13(TP-13)
N05694: U2.13(TP-13) U17.18(TP-18)
N05696: U2.19(TP-19) U17.12(TP-12)
N05698: U2.17(TP-17) U17.14(TP-14)
N05700: U2.14(TP-14) U17.17(TP-17)
N05702: U2.15(TP-15) U17.16(TP-16)
N05704: U2.16(TP-16) U17.15(TP-15)
N11940: U1.13(TP-13) U15.18(TP-18)
N11950: U1.14(TP-14) U15.17(TP-17)
N11984: U1.17(TP-17) U15.14(TP-14)
N11994: U1.18(TP-18) U15.13(TP-13)
N12004: U1.19(TP-19) U15.12(TP-12)
N19706: R1.1(TP-1) U14.18(TP-18)
N19710: R2.1(TP-1) U14.16(TP-16)
N19714: R17.1(TP-1) U14.14(TP-14)
N19718: R12.1(TP-1) U14.12(TP-12)
N19934: D4.2(TP-2) R12.2(TP-2)
N19938: D3.2(TP-2) R17.2(TP-2)
N19942: D1.2(TP-2) R2.2(TP-2)
N23417: U10.6(TP-6) U13.6(TP-6) U16.48(TP-48)
N23878: R11.1(TP-1) U16.36(TP-36)
N24816: U16.14(TP-14) U18.1(TP-1)
N24821: U16.10(TP-10) U18.2(TP-2)
N24826: U16.11(TP-11) U18.3(TP-3) U18.4(TP-4)
N84247: U19.9(TP-9) U20.22(TP-22) U21.9(TP-9) U21.12(TP-12)
N103899: U19.8(TP-8) U19.12(TP-12) U20.19(TP-19) U20.23(TP-23) U21.8(TP-8) U21.11(TP-11)
N255822: D2.2(TP-2) R1.2(TP-2)
N314771: U3.6(TP-6) U4.6(TP-6) U16.51(TP-51)
N315146: U9.6(TP-6) U11.6(TP-6) U16.50(TP-50)
N315333: U8.6(TP-6) U12.6(TP-6) U16.49(TP-49)
N320476: U3.11(TP-11) U4.11(TP-11) U8.11(TP-11) U9.11(TP-11) U10.11(TP-11) U11.11(TP-11) U12.11(TP-11) U13.11(TP-11) U16.57(TP-57)
N336036: C23.1(TP-1) J2.1(TP-1) L1.2(TP-2)
N336041: C18.1(TP-1) J3.1(TP-1) L4.2(TP-2)

Pads without a net: J1 12 48 49 65 66; J2 3 4; J3 3 4; MTH1 1; MTH2 1; MTH3 1; U3 1 8 9 12 13 16 17 24 25; U4 1 8 9 12 13 16 17 24 25; U7 7; U8 1 8 9 12 13 16 17 24 25; U9 1 8 9 12 13 16 17 24 25; U10 1 8 9 12 13 16 17 24 25; U11 1 8 9 12 13 16 17 24 25; U12 1 8 9 12 13 16 17 24 25; U13 1 8 9 12 13 16 17 24 25; U14 13 15 17 19; U16 5 26 27 32 35 37 38 47 55 59 68; U18 5 6 7 8; U19 11; U20 20; U22 1 5 8; U23 1 5 8; U25 1 2 3 4 5 6 7 8 9 11 12 13 14 15 16 17 18 19

## Via types
v1: diameter 0.61, hole 0.33, TOP to BOTTOM, 20 vias
v2: diameter 1.016, hole 0.457, TOP to BOTTOM, 248 vias

## Routing (per net, layer and track width the routed paths; a pad name or vN(x,y) marks a point on that pad's centre or on a via; arc(x,y) is an arc through that point)
AGND: length 43.1
  TOP w0.381: U1.7 v2(84.67,17.78) 85.98,17.78 86.36,18.16 86.36,20.8 85.57,21.59 v2(84.67,21.59) U1.10 79.59,21.59 v2(78.11,20.11) ; U2.3 v2(84.67,29.84) ; v2(84.67,38.73) U2.10 ; v2(106.89,9.31) 107.9,9.31 110.07,11.48 v2(110.07,13.97) U6.3 ; v2(84.67,12.7) U1.3 ; 82.55,34.92 v2(84.67,34.92) ; v2(110.07,35.56) U5.3
  BOTTOM w0.381: v2(106.89,9.31) 106.81,9.23 C6.2 ; v2(80.22,31.12) 80.12,31.22 C22.2 ; C21.2 v2(78.11,20.11) ; C1.2 107.44,31.45 v2(107.53,31.54)
GND: length 361.7
  TOP w0.381: U19.34 v2(18.84,80.64) ; U20.10 v2(32.6,29.21) ; v2(54.4,38.73) U17.1 ; U20.39 v2(18.84,29.21) ; v2(84.67,27.3) U2.1 ; U20.28 v2(18.84,36.2) ; v2(32.6,57.15) U21.15 ; U15.1 v2(54.4,21.59) v2(54.4,10.16) U15.10 62.86,10.16 64.14,8.89 69.64,8.89 v2(70.91,10.16) ; v2(32.6,84.45) U19.21 ; v2(85.09,98) U13.27 85.09,95.6 84.52,95.03 84.52,94.81 84.11,94.4 83.42,94.4 81.79,92.77 77.41,92.77 74.93,95.25 74.93,112.65 75.31,113.03 81.97,113.03 82.01,113.07 83.09,113.07 83.13,113.03 84.03,113.03 v2(85.09,111.97) U9.27 ; U19.45 v2(18.84,73.66) ; U3.27 v2(109.22,98) 108.58,98.64 102.6,98.64 102.17,99.07 102.17,101.59 102.4,101.82 108.93,101.82 109.43,102.32 v2(109.43,107.95) ; v2(32.6,53.98) 30.48,53.98 ; v2(32.6,73.66) U19.4 ; v2(18.84,25.4) U20.45 ; U19.28 v2(18.84,84.45) ; v2(70.91,10.16) 72.18,8.89 76.2,8.89 76.84,8.25 76.84,5.71 84.45,5.71 84.67,5.93 v2(84.67,10.16) U1.1 ; v2(70.91,10.16) U1.20 ; U12.27 v2(85.09,70.06) ; U21.28 v2(18.84,60.96) ; v2(74.3,22.65) 74.3,23.92 v2(70.91,27.3) U2.20 ; v2(50.38,73.02) U25.10 ; v2(109.22,70.06) U11.27 ; U20.21 v2(32.6,36.2) ; U16.74 68.5,108.08 v2(68.58,108.16) ; U10.27 v2(109.22,84.03) ; v2(64.77,78.95) U16.53 ; U19.1 v2(32.6,71.75) ; v2(32.6,50.16) U21.4 ; v2(32.6,60.96) U21.21 ; v2(32.6,77.47) U19.10 ; v2(109.22,111.97) U4.27 ; U19.39 v2(18.84,77.47) ; U21.1 v2(32.6,48.26) ; U20.34 v2(18.84,32.38) ; v2(35.56,101.81) 35.64,101.73 U16.17 ; U14.1 v2(54.4,55.88) ; U20.15 v2(32.6,32.38) ; U21.34 v2(18.84,57.15) ; U20.24 v2(32.6,38.1) ; U16.75 v2(64.77,111.97) ; U20.4 v2(32.6,25.4) ; U21.48 v2(18.84,48.26) ; 21.08,53.98 v2(18.84,53.98) ; U14.10 v2(54.4,44.45) ; U21.45 v2(18.84,50.16) ; v2(18.84,71.75) U19.48 ; U20.25 v2(18.84,38.1) ; v2(54.4,27.3) U17.10 ; v2(32.6,80.64) U19.15 ; v2(85.09,84.03) U8.27
  BOTTOM w0.381: C13.2 109.35,94.92 109.43,94.83 v2(109.43,93.98) ; v2(38.73,19.05) 38.73,21.59 C7.2 40.41,23.27 v2(40.43,23.28) ; v2(38.73,19.05) C24.2 ; v2(38.73,19.05) v2(38.73,16.51) ; v2(85.3,66.04) 85.3,66.89 85.22,66.98 85.22,67.95 ; v2(32.6,25.4) 38.31,25.4 v2(40.43,23.28) ; 85.22,95.89 85.22,94.92 85.3,94.83 v2(85.3,93.98) ; v2(70.91,27.3) 71.86,27.3 72.79,26.37 72.79,26.16 74.19,24.77 C2.2 74.4,22.75 v2(74.3,22.65) 74.3,13.55 v2(70.91,10.16) 70.91,7.62 C3.2 ; J1.34 J1.35 ; J1.35 J1.36 v2(18.84,25.4) ; J1.35 J1.3 ; v2(109.43,107.95) 109.43,108.8 109.35,108.89 C4.2 ; v2(54.4,27.3) 48.89,27.3 U7.13 44.87,23.28 v2(40.43,23.28) ; C5.2 v2(38.73,6.35) ; v2(38.73,6.35) v2(38.73,8.89) ; v2(38.73,6.35) 38.73,3.81 C19.2 ; C10.2 24,68.92 v2(23.92,69) ; U7.11 U7.12 40,24.61 40.43,24.19 v2(40.43,23.28) ; C14.2 109.35,66.98 109.43,66.89 v2(109.43,66.04) ; v2(23.92,21.38) 24,21.29 C15.2 ; v2(38.73,11.43) v2(38.73,13.97) ; v2(38.73,11.43) v2(38.73,8.89) ; v2(38.73,11.43) C16.2 ; v2(38.73,13.97) v2(38.73,16.51) ; v2(38.73,13.97) C17.2 ; v2(38.73,8.89) C8.2 ; C9.2 24,91.14 v2(23.92,91.23) ; v2(85.94,107.95) 85.94,108.8 85.85,108.89 C25.2 ; 85.22,81.91 85.22,80.95 85.3,80.86 v2(85.3,80.01) ; C20.2 v2(38.73,16.51) ; C11.2 24,46.06 v2(23.92,46.14) ; v2(109.43,80.01) 109.43,80.86 109.35,80.95 C12.2
GND_EARTH: length 5.5
  BOTTOM w0.381: C18.2 v2(117.9,26.67) ; C23.2 v2(117.9,24.13)
VCC: length 175.2
  TOP w0.381: U21.31 v2(18.84,59.05) ; U1.2 v2(84.67,11.43) ; U19.31 v2(18.84,82.55) ; v2(68.16,38.73) U17.20 65.25,38.73 64.75,38.24 64.75,37.96 64.55,37.75 64.55,37.18 64.75,36.97 64.75,36.69 64.55,36.48 64.55,35.91 64.75,35.7 64.75,35.42 64.55,35.21 64.55,34.64 64.75,34.43 64.75,34.15 64.55,33.94 64.55,33.37 64.75,33.16 64.75,32.88 64.55,32.67 64.55,32.1 64.75,31.89 64.75,31.61 64.55,31.4 64.55,30.83 64.75,30.62 64.75,30.34 64.55,30.13 64.55,29.56 64.75,29.35 64.75,29.07 64.55,28.86 64.55,28.29 64.75,28.08 64.75,27.8 64.55,27.59 64.55,22.29 65.25,21.59 U15.20 v2(68.16,21.59) ; 66.55,105.54 68.5,105.54 v2(68.58,105.62) ; v2(18.84,27.3) U20.42 ; v2(32.6,34.29) U20.18 ; U20.7 v2(32.6,27.3) ; v2(63.5,78.95) U16.52 ; U21.7 v2(32.6,52.07) ; v2(18.84,52.07) U21.42 ; v2(35.56,103.08) 35.64,103 U16.16 ; U14.20 v2(67.1,55.88) ; v2(18.84,75.56) U19.42 ; v2(84.67,37.46) 82.55,37.46 ; v2(84.67,20.32) U1.9 ; U25.20 v2(37.68,61.59) ; U21.18 v2(32.6,59.05) ; U20.31 v2(18.84,34.29) ; v2(58.42,111.97) U16.80 ; U19.18 v2(32.6,82.55) ; U19.7 v2(32.6,75.56) ; U2.2 v2(84.67,28.58)
  BOTTOM w0.381: C28.1 v2(81.92,69.64) ; v2(68.16,21.59) 68.16,8.68 71.49,5.35 75.12,5.35 76.11,6.34 76.11,12.15 75.56,12.7 75.56,22.94 77.47,24.84 77.47,26.29 77.85,26.67 78.26,26.67 78.47,26.88 v2(79.38,26.88) C2.1 ; L6.1 86.57,2.54 81.09,8.02 81.09,8.93 80.28,9.74 v2(79.38,9.74) ; v2(82.55,111.76) C25.1 ; v2(81.92,83.61) C27.1 ; v2(79.38,9.74) C3.1 ; v2(79.38,9.74) 81.07,11.43 v2(84.67,11.43) ; v2(27.3,91.23) C9.1 ; v2(27.3,46.14) C11.1 ; C13.1 v2(106.05,97.58) v1(106.05,102.87) C4.1 v2(106.05,111.55) ; C26.1 v2(81.92,97.58) ; v2(27.3,21.38) C15.1 ; v2(27.3,69) C10.1 ; v2(106.05,83.61) C12.1 ; C14.1 v2(106.05,69.64)
A0: length 13.6
  TOP w0.203: U19.47 22.16,72.39 22.58,71.97 22.58,71.54 21.98,70.94 18.5,70.94 18.32,71.12 J1.54
A1: length 10.1
  TOP w0.203: U19.46 19.35,73.02 19.18,72.85 12.24,72.85 J1.55
A2: length 27.5
  TOP w0.203: U19.44 22.58,74.3 23.49,73.38 23.49,70.42 22.06,68.99 12.57,68.99 11.88,69.67 10.36,69.67 10.16,69.88 10.16,76.02 10.34,76.2 J1.56
A3: length 36.2
  TOP w0.203: J1.57 9.73,78.74 9.52,78.54 9.52,67.34 9.73,67.13 11.88,67.13 12.34,66.67 20.32,66.67 24.13,70.48 24.13,73.38 22.58,74.93 U19.43
A4: length 47.3
  TOP w0.203: U19.41 22.86,76.2 24.99,74.07 24.99,66.27 23.49,64.77 10.16,64.77 8.89,66.04 8.89,80.64 9.52,81.28 J1.58
A5: length 54.7
  TOP w0.203: U19.40 22.86,76.83 25.4,74.3 25.4,66.04 23.49,64.14 14.6,64.14 12.7,62.23 11.15,62.23 8.25,65.13 8.25,82.55 9.52,83.82 J1.59
A6: length 16.6
  TOP w0.203: J1.60 15.24,82.55 15.24,77.67 15.44,77.47 17.69,77.47 18.5,78.28 19.18,78.28 19.35,78.11 U19.38
A16: length 11
  TOP w0.203: U20.36 19.58,31.12 18.54,30.07 18.01,30.07 15.88,27.94 J1.37
A17: length 10.2
  TOP w0.203: U20.35 19.58,31.75 18.31,30.48 J1.38
A18: length 9.8
  TOP w0.203: U20.33 19.35,33.02 19.18,33.2 18.5,33.2 18.32,33.02 J1.39
A19: length 18.7
  TOP w0.203: J1.40 14.78,38.91 21.98,38.91 22.58,38.31 22.58,34.08 22.16,33.66 U20.32
A20: length 14.8
  TOP w0.203: J1.41 10.34,37.01 10.34,35.11 10.98,34.47 17.87,34.47 18.5,35.1 19.35,35.1 19.52,34.92 U20.30
A21: length 17.8
  TOP w0.203: 22.47,33.34 22.99,33.85 22.99,38.48 22.15,39.32 12.75,39.32 J1.42
A22: length 12.1
  BOTTOM w0.203: J1.43 17.6,37.01 v1(20.95,37.01)
A23: length 12.7
  BOTTOM w0.203: J1.44 12.7,45.72 v1(20.8,37.62)
BD4: length 0.7
  TOP w0.203: U16.21 36.88,96.65
D0: length 1.1
  TOP w0.203: U19.26 20.01,85.72
D4: length 38.4
  TOP w0.203: J1.24 5.08,77.47 4.01,77.47 3.81,77.67 3.81,86.79 4.47,87.45 11.88,87.45 12.34,87 22.5,87 22.58,86.92 22.58,85.82 22.91,85.49 22.91,82.12 22.71,81.91 U19.32
D5: length 46.5
  TOP w0.203: U19.33 23.11,81.28 23.32,81.48 23.32,85.66 22.99,85.99 22.99,87.55 22.91,87.63 15.24,87.63 12.88,89.99 5.74,89.99 3.17,87.43 3.17,75.13 3.38,74.93 5.08,74.93 J1.23
D6: length 93.6
  TOP w0.203: J1.4 7.44,24.31 7.44,15.42 10.79,12.07 17.14,12.07 22.28,17.2 22.28,22.99 22.58,23.28 22.58,23.71 22.16,24.13 U20.47 ; J1.22 5.08,72.39 2.74,72.39 2.54,72.59 2.54,90.17 4.9,92.53 11.88,92.53 16.15,88.27 23.32,88.27 23.39,88.19 23.39,86.16 23.72,85.83 23.72,80.21 23.52,80.01 U19.35
D7: length 64.7
  TOP w0.203: J1.21 5.08,69.85 2.11,69.85 1.9,70.05 1.9,91.08 5.9,95.07 12.24,95.07 18.41,88.9 23.72,88.9 23.8,88.82 23.8,86.33 24.13,86 24.13,79.58 23.93,79.38 U19.36
D9: length 36.2
  TOP w0.203: U20.46 19.58,24.77 19.05,24.23 19.05,16.22 16.16,13.34 10.79,13.34 8.25,15.88 8.25,26.03 J1.5
D10: length 19.3
  TOP w0.203: U20.44 19.58,26.03 19.54,26.08 19.31,26.08 19.18,26.21 18.5,26.21 18.03,25.74 18.03,25.65 16.51,24.13 11.15,24.13 10.34,24.95 10.34,26.49 J1.6
D11: length 17.7
  BOTTOM w0.203: v1(20.32,26.67) 20.32,26.97 19.18,28.12 18.78,28.12 13.88,33.02 12.98,33.02 11.88,31.93 7.44,31.93 J1.7
D12: length 57.2
  TOP w0.203: U20.41 22.66,27.94 22.99,27.61 22.99,16.84 16.94,10.79 9.98,10.79 3.17,17.6 3.17,32.38 J1.8
D13: length 67.3
  TOP w0.203: J1.9 3.81,38.1 2.54,36.83 2.54,17.66 10.04,10.16 18.85,10.16 24.77,16.08 24.77,28.37 24.56,28.58 21.08,28.58
D14: length 73.6
  TOP w0.203: U20.38 25.2,29.84 25.4,29.64 25.4,15.44 19.48,9.53 10.1,9.53 2.13,17.5 2.13,38.33 4.44,40.64 J1.10
D15: length 78.2
  TOP w0.203: U20.37 25.83,30.48 26.04,30.28 26.04,15.3 19.63,8.89 10.16,8.89 1.72,17.33 1.72,38.55 J1.11
N00036_6360: length 6.6
  TOP w0.203: U1.8 81.76,19.05 80.64,17.93 80.64,15.88 81.28,15.24 U1.5
N00038_6372: length 17.2
  TOP w0.203: L3.2 87.86,8.66 87.86,10.66 84.39,14.13 83.79,14.13 83.42,13.77 83.22,13.97 v1(82.55,13.97)
  BOTTOM w0.203: v1(82.55,13.97) 81.28,12.7 C21.1
N00060_6368: length 13.5
  TOP w0.203: U23.3 93.21,19.19 92.14,19.19 91.08,18.13 91.08,17.07 90.53,16.51 U1.6
RA0: length 59.2
  TOP w0.203: U11.5 107.95,57.02 107.14,56.21 101.27,56.21 100.97,56.52 100.97,59.49 98.86,61.59 84.02,61.59 83.82,61.39 U12.5 ; U8.5 83.82,74.3 82.55,75.56 77.04,75.56 76.84,75.77 76.84,84.25 77.04,84.45 82.7,84.45 83.82,85.57 U13.5
RA1: length 66.8
  TOP w0.203: U3.4 106.68,85.57 105.94,84.83 105.54,84.83 105.16,84.45 101.8,84.45 101.6,84.66 101.6,88.7 100.13,90.17 82.75,90.17 82.55,89.97 U13.4 ; U11.4 106.68,57.63 105.66,56.62 101.8,56.62 101.6,56.82 101.6,59.69 99.06,62.23 82.75,62.23 82.55,62.03 U12.4
RA2: length 68.2
  TOP w0.203: U11.3 105.41,57.63 104.8,57.02 102.44,57.02 102.26,57.2 102.26,58.55 102.23,58.57 102.23,60.32 99.7,62.86 81.48,62.86 81.28,62.66 U12.3 ; U3.3 105.41,85.57 104.8,84.96 102.44,84.96 102.26,85.14 102.26,85.9 102.23,85.93 102.23,89.53 100.97,90.8 81.48,90.8 81.28,90.6 U13.3
RA3: length 63.8
  TOP w0.203: U3.2 104.14,88.9 101.6,91.44 80.64,91.44 80.01,90.8 U13.2 ; U11.2 104.14,59.82 100.46,63.5 81.28,63.5 80.01,62.23 U12.2
RA4: length 37.6
  TOP w0.203: U9.32 78.74,110.49 78.69,110.54 78.35,110.54 78.35,110.54 78.09,110.54 77.65,110.09 77.65,109.67 78.11,109.22 78.11,97.31 78.74,96.67 U13.32 ; U4.32 102.87,110.64 102.67,110.85 102.38,110.85 102.18,110.65 102.18,102.3 101.68,101.79 101.68,98.87 102.18,98.36 102.18,94.23 102.44,93.98 102.67,93.98 102.87,94.18 U3.32
RA5: length 48.8
  TOP w0.203: U13.31 80.01,95.5 78.99,94.49 78.49,94.49 77.47,95.5 77.47,108.06 77.24,108.29 77.24,110.26 77.92,110.94 78.18,110.94 78.49,111.25 78.99,111.25 79.3,110.95 79.71,110.95 80.01,110.64 U9.31 ; U3.31 104.14,94.18 103.48,93.52 102.32,93.52 101.78,94.06 101.78,98.19 101.27,98.7 101.27,101.96 101.78,102.47 101.78,111.27 102.26,111.76 102.93,111.76 103.61,111.07 103.71,111.07 104.14,110.64 U4.31
RA6: length 58
  TOP w0.203: U3.30 105.41,95.1 104.98,94.67 104.98,94.18 103.91,93.12 101.61,93.12 101.37,93.35 101.37,98.02 100.86,98.53 100.86,102.13 101.37,102.64 101.37,111.53 102.23,112.39 103.66,112.39 105.41,110.64 U4.30 ; U13.30 81.28,95.5 79.86,94.08 78.32,94.08 76.84,95.56 76.84,111.15 77.04,111.35 77.67,111.35 77.67,111.35 78.01,111.35 78.32,111.66 79.16,111.66 79.47,111.35 80.57,111.35 81.28,110.64 U9.30
RA7: length 68.9
  TOP w0.203: U4.29 106.68,110.64 107.11,111.07 107.11,111.96 106.05,113.03 101.54,113.03 100.97,112.45 100.97,102.81 100.46,102.3 100.46,98.36 100.97,97.85 100.97,92.91 101.17,92.71 104.2,92.71 106.15,94.67 106.25,94.67 106.68,95.1 U3.29 ; U9.29 82.55,110.61 81.74,111.42 81.74,111.56 81.53,111.76 79.64,111.76 79.33,112.06 78.15,112.06 77.84,111.76 76.4,111.76 76.2,111.56 76.2,95.62 78.15,93.68 80.72,93.68 82.55,95.5 U13.29
RA8: length 78.7
  TOP w0.203: U9.28 83.82,112.19 83.62,112.39 83.07,112.39 82.89,112.57 82.21,112.57 82.03,112.39 79.58,112.39 79.5,112.47 77.98,112.47 77.9,112.39 75.77,112.39 75.56,112.19 75.56,95.68 77.98,93.27 81.58,93.27 83.82,95.5 U13.28 ; U4.28 107.95,111.76 106.05,113.66 101.6,113.66 100.33,112.39 100.33,102.75 100.05,102.47 100.05,98.19 100.33,97.91 100.33,92.71 100.97,92.08 104.93,92.08 107.95,95.1 U3.28
RA9: length 14
  TOP w0.203: U4.22 v1(115.57,104.77)
  BOTTOM w0.203: v1(115.57,104.77) v1(115.57,95.89)
RA10: length 74.4
  TOP w0.203: U3.21 116.84,95.1 117.27,94.67 117.68,94.67 119.63,92.71 123.19,92.71 124.46,93.98 124.46,112.39 123.83,113.03 119.23,113.03 116.84,110.64 U4.21 ; U9.21 92.71,110.64 95.1,113.03 98.42,113.03 99.7,111.76 99.7,102.69 99.64,102.64 99.64,98.02 99.7,97.97 99.7,93.98 98.42,92.71 95.1,92.71 92.71,95.1 U13.21
RA11: length 64.1
  TOP w0.203: U9.20 93.98,110.64 95.73,112.39 98.42,112.39 99.29,111.53 99.29,102.86 99.24,102.81 99.24,97.85 99.29,97.8 99.29,94.21 98.42,93.34 95.73,93.34 93.98,95.1 U13.20 ; U3.20 118.11,95.1 118.54,94.67 118.64,94.67 119.96,93.34 122.56,93.34 123.83,94.61 123.83,111.76 123.19,112.39 119.96,112.39 118.64,111.07 118.54,111.07 118.11,110.64 U4.20
RA12: length 54.6
  TOP w0.203: U4.19 119.38,110.64 120.5,111.76 122.56,111.76 123.19,111.12 123.19,94.61 122.56,93.98 120.59,93.98 119.9,94.67 119.81,94.67 119.38,95.1 U3.19 ; U9.19 95.25,111.25 95.76,111.76 98.42,111.76 98.88,111.3 98.88,103.04 98.83,102.98 98.83,97.68 98.88,97.62 98.88,94.44 98.42,93.98 96.37,93.98 95.25,95.1 U13.19
RA13: length 45.1
  TOP w0.203: U9.18 96.52,110.64 97.13,111.25 98.04,111.25 98.48,110.82 98.48,103.21 98.42,103.15 98.42,97.51 98.48,97.45 98.48,94.92 98.04,94.49 96.72,94.49 96.52,94.69 U13.18 ; U4.18 120.65,110.64 121.26,111.25 122.17,111.25 122.78,110.64 122.78,94.79 122.49,94.49 121.26,94.49 120.65,95.1 U3.18
RD5: length 31.4
  TOP w0.203: U12.23 90.17,64.77 90.81,64.14 114.3,64.14 U11.23
RD7: length 30.8
  TOP w0.203: U3.7 110.49,85.57 109.88,84.96 109,84.96 107.99,83.95 106.86,83.95 106.38,84.42 105.71,84.42 104.6,83.31 86.56,83.31 86.36,83.52 U13.7 ; 86.36,57.63 U12.7 ; U11.7 110.49,57.63
VCLKA: length 20.4
  TOP w0.203: U1.11 73.81,21.59 74.42,20.98 74.42,11.18 74.02,10.77 71.45,10.77 71.25,10.97 70.57,10.97 69.76,10.16 U15.11
VD0: length 58.6
  TOP w0.203: U14.2 57.3,54.61 57.91,55.22 57.91,69.27 46.99,80.19 U16.39 ; U17.2 57.3,37.46 57.91,36.86 57.91,21.11 57.12,20.32 v1(56.52,20.32)
  BOTTOM w0.203: v1(56.52,20.32) 55.58,21.25 55.21,21.25 54.74,20.78 54.06,20.78 53.25,21.59 R7.2
VD1: length 73.2
  TOP w0.203: U14.3 57.3,53.34 58.32,54.36 58.32,69.52 48.26,79.58 U16.40 ; U17.3 53.54,36.2 53.34,36.4 53.34,39.8 53.54,40 57.9,40 58.32,39.59 58.32,20.24 57.12,19.05 v1(56.52,19.05)
  BOTTOM w0.203: R13.2 v1(56.52,19.05)
VD2: length 80.2
  TOP w0.203: U16.41 49.53,79.38 58.72,70.18 58.72,53.49 57.3,52.07 U14.4 ; v1(56.52,17.78) 57.12,17.78 58.72,19.38 58.72,39.76 57.84,40.64 52.91,40.64 52.7,40.44 52.7,35.13 52.91,34.92 56.52,34.92
  BOTTOM w0.203: v1(56.52,17.78) 53.97,17.78 52.7,16.51 R14.2
VD3: length 88.8
  TOP w0.203: U16.42 50.8,79.38 59.13,71.04 59.13,52.7 57.73,51.31 57.73,51.23 57.3,50.8 U14.5 ; U17.5 53.34,33.66 52.07,34.92 52.07,41.07 52.27,41.27 59.49,41.27 59.69,41.07 59.69,18.9 57.3,16.51 v1(56.52,16.51)
  BOTTOM w0.203: v1(56.52,16.51) 55.71,17.32 55.42,17.32 52.07,13.97 R15.2
VD4: length 95.8
  TOP w0.203: U17.6 53.34,32.38 51.44,34.29 51.44,41.71 51.64,41.91 60.12,41.91 60.33,41.71 60.33,17.65 57.91,15.24 v1(56.52,15.24) ; U16.43 52.07,78.74 59.69,71.12 59.69,51.92 57.3,49.53 U14.6
  BOTTOM w0.203: R9.2 51.44,11.43 55.25,15.24 v1(56.52,15.24)
VD5: length 101.3
  TOP w0.203: U15.7 57.3,13.97 60.96,17.63 60.96,41.97 60.56,42.37 51.26,42.37 50.8,41.91 50.8,34.29 53.97,31.12 U17.7 ; U14.7 57.3,48.26 57.91,48.87 57.91,49.46 60.33,51.88 60.33,71.75 53.34,78.74 U16.44
  BOTTOM w0.203: v1(55.88,13.97) 54.84,13.97 R8.2
VD6: length 109.2
  TOP w0.203: v1(56.52,12.7) 57.3,12.7 57.73,13.13 57.73,13.23 61.59,17.09 61.59,41.91 60.73,42.77 50.97,42.77 50.17,41.97 50.17,33.66 53.97,29.84 U17.8 ; U14.8 57.3,46.99 58.32,48.01 58.32,49.29 60.96,51.94 60.96,72.39 54.61,78.74 U16.45
  BOTTOM w0.203: v1(56.52,12.7) 54.61,12.7 50.8,8.89 50.8,7.39 R10.2
VD7: length 117.2
  TOP w0.203: v1(56.52,11.43) 57.3,11.43 62.23,16.36 62.23,42.55 61.59,43.18 50.8,43.18 49.76,42.14 49.76,33.48 54.67,28.58 U17.9 ; U16.46 55.88,78.74 61.59,73.02 61.59,51.99 58.72,49.12 58.72,46.02 58.42,45.72 U14.9
  BOTTOM w0.203: v1(56.52,11.43) 53.97,11.43 52.07,9.53 52.07,6.12 R16.2
N00306: length 7
  TOP w0.203: U15.19 U1.12
N00318: length 7
  TOP w0.203: U15.16 U1.15
N00322: length 7
  TOP w0.203: U15.15 U1.16
N00671: length 5.1
  BOTTOM w0.203: C19.1 R16.1
N00689: length 5.1
  BOTTOM w0.203: C5.1 R10.1
N00703: length 5.1
  BOTTOM w0.203: C8.1 R8.1
N00717: length 5.1
  BOTTOM w0.203: C16.1 R9.1
N00827: length 5.1
  BOTTOM w0.203: C17.1 R15.1
N00831: length 5.1
  BOTTOM w0.203: C20.1 R14.1
N00835: length 5.1
  BOTTOM w0.203: C24.1 R13.1
N00837: length 5.1
  BOTTOM w0.203: C7.1 R7.1
N04966: length 3.8
  TOP w0.203: L5.1 L3.1
N05690: length 7
  TOP w0.203: 73.03,37.46 U17.19
N05692: length 7
  TOP w0.203: U2.18 U17.13
N05694: length 7
  TOP w0.203: U2.13 U17.18
N05696: length 7
  TOP w0.203: U2.19 U17.12
N05698: length 7
  TOP w0.203: U2.17 U17.14
N05700: length 7
  TOP w0.203: 73.03,34.92 66.04,34.92
N05702: length 7
  TOP w0.203: U2.15 U17.16
N05704: length 7
  TOP w0.203: U2.16 U17.15
N11940: length 7
  TOP w0.203: U15.18 U1.13
N11950: length 7
  TOP w0.203: U15.17 U1.14
N11984: length 7
  TOP w0.203: U15.14 U1.17
N11994: length 7
  TOP w0.203: U15.13 U1.18
N12004: length 7
  TOP w0.203: U15.12 U1.19
N19706: length 13.2
  TOP w0.203: U14.18 v1(78.11,53.34)
N19710: length 13.2
  TOP w0.203: U14.16 v1(78.11,50.8)
N19714: length 13.8
  TOP w0.203: U14.14 v1(78.74,48.26)
N19718: length 13.2
  TOP w0.203: U14.12 v1(78.11,45.72)
N19934: length 36.3
  BOTTOM w0.203: D4.2 113.67,46.99 104.78,46.99 104.14,47.62 83.19,47.62 81.28,45.72 R12.2
N19938: length 26.9
  BOTTOM w0.203: R17.2 81.28,48.26 82.55,49.53 103.51,49.53 104.78,48.26 D3.2
N19942: length 18.7
  BOTTOM w0.203: D1.2 97.33,50.8 96.7,51.43 81.92,51.43 81.28,50.8 R2.2
N24826: length 2.5
  TOP w0.203: U18.4 U18.3
N255822: length 10.6
  BOTTOM w0.203: R1.2 D2.2

## Copper pours and planes (outline as drawn; the poured copper is in the pictures)
AGND on GND: 0,21.59 8.89,21.59 8.89,19.05 17.78,19.05 25.4,11.43 29.21,11.43 36.2,4.45 50.17,4.45 52.07,6.35 76.84,6.35 76.84,40.64 87,40.64 87,28.58 82.55,28.58 82.55,24.13 87.63,24.13 87.63,11.43 82.55,11.43 82.55,6.35 104.78,6.35 104.78,38.73 111.12,38.73 111.12,0 21.59,0 21.59,5.08 0,5.08
GND on GND: 21.59,5.08 0,5.08 0,109.22 21.59,109.22 21.59,114.3 123.19,114.3 125.73,111.76 125.73,2.54 123.19,0 21.59,0
GND_EARTH on GND: 111.12,0 123.19,0 125.73,2.54 125.73,45.72 111.12,45.72
VCC on POWER: 21.59,5.08 0,5.08 0,109.22 21.59,109.22 21.59,114.3 123.19,114.3 125.73,111.76 125.73,2.54 123.19,0 21.59,0
